# Altium PCB Waveshape_LFO_v1_Main_PCB.PcbDoc
Units mm, origin at the board's own origin, x right, y up, seen from the top; angles counter-clockwise.
Board outline 40 x 105 mm, 2 copper layers (Top Layer, Bottom Layer); 38 components, 28 nets, 124 pads, 29 vias.
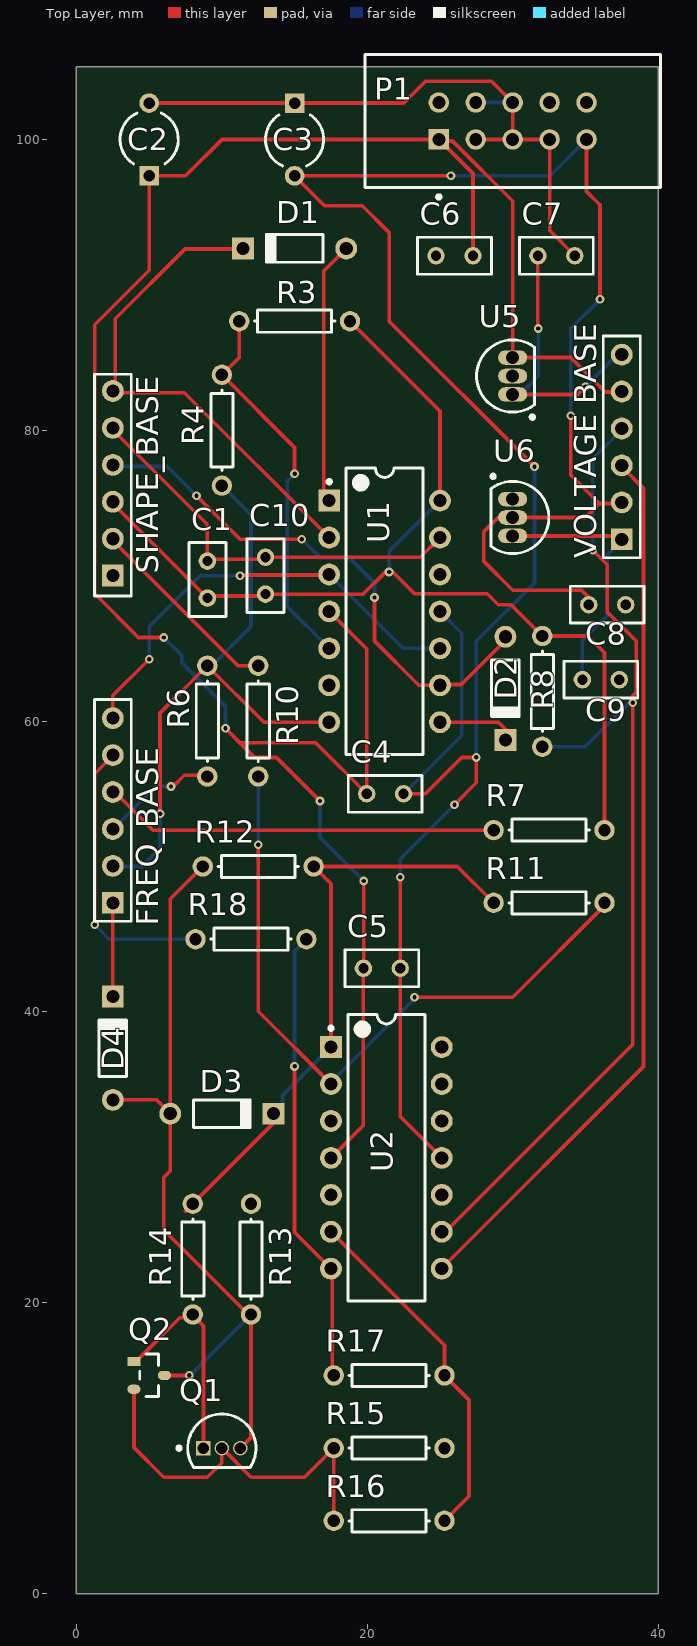
[diagram p0: Top Layer view]
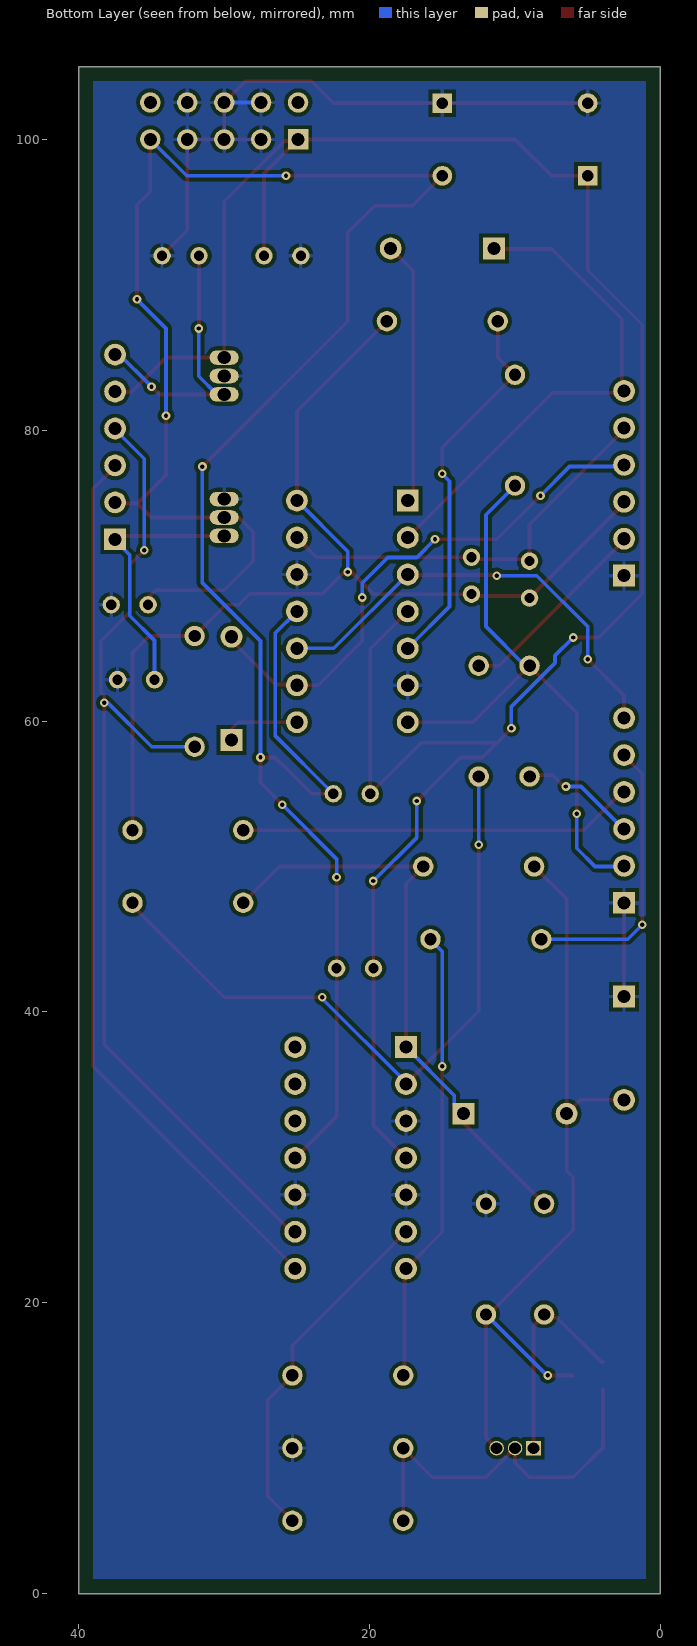
[diagram p1: Bottom Layer view, seen from below]

## Layer stack, top to bottom
Top Solder: solder mask 0.0102, Solder Resist, Dk 3.5
Top Layer: signal copper 0.0356
Dielectric 1: dielectric 0.32, FR-4, Dk 4.8
Bottom Layer: signal copper 0.0356
Bottom Solder: solder mask 0.0102, Solder Resist, Dk 3.5

## Board outline
0,105 40,105 40,0 0,0

## Design rules (kind name [scope] priority, off if disabled: settings)
Clearance [All] p1: gap=0.254 ignorepadtopadclearanceinfootprint=FALSE except(0: Arc-Hole Track-Hole SMDPad-Hole THPad-Hole Via-Hole Fill-Hole Poly-Hole Region-Hole Text-Hole)
PolygonConnect [All] p1: connectstyle=Relief reliefconductorwidth=0.254 reliefentries=4 polygonreliefangle="90 Angle" airgapwidth=0.254
RoutingVias [All] p1: holewidth=0.711 width=1.27 viastyle="Through Hole" minholewidth=0.711 minwidth=1.27 maxholewidth=0.711 maxwidth=1.27
SolderMaskExpansion [All] p1: expansion=0.102 istentingtop=FALSE
Width [All] p1: maxlimit=0.254 minlimit=0.254 preferedwidth=0.254
30 further rules are at their usual default settings.

## Components (designator, comment, footprint, x,y, rotation, side; value= is the part's Value field where it differs from the comment)
C1 "Cap" RAD-0.1 9,69.73 r270 top value=1uF
C2 "Cap Pol1" CAPR5-4X5 5,100 r90 top value=100uF
C3 "Cap Pol1" CAPR5-4X5 15,100 r270 top value=100uF
C4 "Cap" RAD-0.1 21.23,55 r0 top value=1n
C5 "Cap" RAD-0.1 21,43 r0 top value=1n
C6 "Cap" RAD-0.1 26,92 r180 top value=0.33uF
C7 "Cap" RAD-0.1 33,92 r0 top value=0.1uF
C8 "Cap" RAD-0.1 36.5,68 r180 top value=0.33uF
C9 "Cap" RAD-0.1 36.06,62.846 r180 top value=0.1uF
C10 "Cap" RAD-0.1 13,70 r270 top value=1uF
D1 "Diode 1N4148" DO-35 15,92.5 r180 top
D2 "Diode 1N4148" DO-35 29.5,62.25 r270 top
D3 "1N4148" DO-35 10,33 r0 top
D4 "Diode 1N4148" DO-35 2.5,37.5 r90 top
FREQ_BASE "Header 6" HDR1X6#1 2.5,47.5 r90 top
P1 "5103309-1" TECO-5103309-1_V 30,101.27 r180 top
Q1 "J112" ONSC-TO-92-3-29-11 10,10 r0 top
Q2 "MMBFJ201" FP-318BM-IPC_C 5,15 r0 top
R3 "" AXIAL-0.3 15,87.5 r180 top value=100K
R4 "" AXIAL-0.3 10,80 r270 top value=100K
R6 "" AXIAL-0.3 9,60 r270 top value=10K
R7 "" AXIAL-0.3 32.5,52.5 r0 top value=10K
R8 "" AXIAL-0.3 32.036,62.04 r90 top value=4.7K
R10 "" AXIAL-0.3 12.5,60 r90 top value=100K
R11 "" AXIAL-0.3 32.5,47.5 r180 top value=100K
R12 "" AXIAL-0.3 12.5,50 r0 top value=1M
R13 "" AXIAL-0.3 12,23 r270 top value=1M
R14 "" AXIAL-0.3 8,23 r270 top value=1K
R15 "" AXIAL-0.3 21.5,10 r180 top value=1K
R16 "" AXIAL-0.3 21.5,5 r0 top value=10K
R17 "" AXIAL-0.3 21.5,15 r180 top value=10K
R18 "" AXIAL-0.3 12,45 r180 top value=10K
SHAPE_BASE "Header 6" HDR1X6#2 2.5,69.88 r90 top
U1 "TL074" N0014A 21.19,67.54 r0 top
U2 "TL074" N0014A 21.31,29.96 r0 top
U5 "L78L05ACZ" TO-92 30,83.73 r0 top
U6 "L79L05ACZ" TO-92 30,74 r180 top
"VOLTAGE BASE" "Header 6" HDR1X6#1 37.5,72.5 r90 top

## Footprints (in the part's own frame and the unit in brackets; to place one, negate y for a bottom-side part, rotate by r counter-clockwise, add the part's x,y. Pads: shape width x height; smd on the part's side, far side on the other; paste and mask are expansions set on the pad)
AXIAL-0.3 [mm] "Axial Device, Thru-Hole; 2 Leads; 0.3 in Pin Spacing"
  round 1.4 hole 0.85: 1(-3.81,0) 2(3.81,0)
  silkscreen extent -2.77,-0.76 2.77,0.76
CAPR5-4X5 [mm] "Capacitor; 2 Leads"
  rect 1.35x1.35 hole 0.8: 1(-2.5,0)
  round 1.35 hole 0.8: 2(2.5,0)
  silkscreen extent -1.69,-2 1.82,2
DO-35 [mm] "Diode, Axial; Body 3.8 x 1.9 mm (LxDia. max), Lead Dia. 0.53 mm (max)"
  round 1.5 hole 0.9: 1(-3.55,0)
  rect 1.5x1.5 hole 0.9: 2(3.55,0)
  silkscreen extent -1.95,-0.95 2.05,0.95
FP-318BM-IPC_C [mm]
  rect 0.904x0.631 smd paste+0 mask+0: 1(-1.05,0.95)
  rrect100% 0.904x0.631 smd paste+0 mask+0: 2(-1.05,-0.95) 3(1.05,0)
  silkscreen extent -0.65,-1.46 0.65,1.46, body extent -1.6,-1.56 1.6,1.56, height 0.25
HDR1X6#1 [mm] "Connector; Header; 6 Position"
  rect 1.5x1.5 hole 0.9: 1(0,0)
  round 1.5 hole 0.9: 2(2.54,0) 3(5.08,0) 4(7.62,0) 5(10.16,0) 6(12.7,0)
  silkscreen extent -1.27,-1.27 13.97,1.27
HDR1X6#2 [mm] "Connector; Header; 6 Position"
  rect 1.5x1.5 hole 0.9: 1(0.12,0)
  round 1.5 hole 0.9: 2(2.66,0) 3(5.2,0) 4(7.74,0) 5(10.28,0) 6(12.82,0)
  silkscreen extent -1.27,-1.27 13.97,1.27
N0014A [mm] "DIP, 14-Leads, Body 19.7x6.6mm, Pitch 2.54mm"
  rect 1.5x1.5 hole 0.9: 1(-3.81,7.62)
  round 1.5 hole 0.9: 2(-3.81,5.08) 3(-3.81,2.54) 4(-3.81,0) 5(-3.81,-2.54) 6(-3.81,-5.08) 7(-3.81,-7.62) 8(3.81,-7.62) 9(3.81,-5.08) 10(3.81,-2.54) 11(3.81,0) 12(3.81,2.54) 13(3.81,5.08) 14(3.81,7.62)
  silkscreen extent -3.93,-9.85 2.65,9.85, body extent -3.95,-9.85 3.95,9.85, height 5.08
ONSC-TO-92-3-29-11 [mm] "TO, 3-Leads, Body Dia 4.7mm, Pitch 1.27mm"
  rect 1x1 hole 0.8: 1(-1.27,0)
  round 1 hole 0.8: 2(0,0) 3(1.27,0)
  silkscreen extent -3.07,-1.34 2.35,2.35, body extent -2.35,-1.33 2.36,2.36, height 7.87
RAD-0.1 [mm] "Radial Cap, Thru-Hole; 2 Leads; 0.1 in Pin Spacing"
  round 1.2 hole 0.7: 1(-1.27,0) 2(1.27,0)
  silkscreen extent -2.54,-1.27 2.54,1.27
TECO-5103309-1_V [mm] "Male Header, 10-Leads, Body 20.32x9.144mm, Pitch 2.54mm"
  rect 1.4x1.4 hole 0.889: 1(5.08,1.27)
  round 1.4 hole 0.889: 2(5.08,-1.27) 3(2.54,1.27) 4(2.54,-1.27) 5(0,1.27) 6(0,-1.27) 7(-2.54,1.27) 8(-2.54,-1.27) 9(-5.08,1.27) 10(-5.08,-1.27)
  silkscreen extent -10.16,-4.57 10.16,5.35, body extent -10.16,-4.57 10.16,4.57, height 9.85
TO-92 [mm] "TO, Flat Index; 3 In-Line, Axial Leads; Body Dia. 4.7mm; Lead Dia. 0.56 mm (max)"
  oval 2x1 hole 0.9: 1(0,-1.27) 2(0,0) 3(0,1.27)
  silkscreen extent -2.48,-2.95 1.5,2.48, body extent -2.48,-2.5 1.5,2.5, height 4.95

## Part data
C1 C4 C5 C6 C7 C8 C9 C10: "Capacitor", LatestRevisionDate=17-Jul-2002, LatestRevisionNote="Re-released for DXP Platform.", PackageDescription="Radial Cap, Thru-Hole; 2 Leads; 0.3 in Pin Spacing", PackageReference=RAD-0.3, Published=8-Jun-2000, Publisher="Altium Limited"
C2 C3: "Polarized Capacitor (Radial)", LatestRevisionDate=17-Jul-2002, LatestRevisionNote="Re-released for DXP Platform.", PackageDescription="Polarized Capacitor (Radial); 2 Leads", PackageReference=RB7.6-15, Published=8-Jun-2000, Publisher="Altium Limited"
D1 D2 D4: "High Conductance Fast Diode", Code_JEDEC=DO-204-AH, ComponentLink1Description="Manufacturer Link", ComponentLink1URL=http://www.fairchildsemi.com/, ComponentLink2Description=Datasheet, ComponentLink2URL=http://www.fairchildsemi.com/ds/1N%2F1N4148.pdf, DatasheetVersion=1997, LatestRevisionDate=17-Jul-2002, LatestRevisionNote="Re-released for DXP Platform.", PackageDescription="Diode, Axial; Body 3.8 x 1.9 mm (LxDia. max), Lead Dia. 0.53 mm (max)", PackageReference=DO-35, Published=8-Jun-2000, Publisher="Altium Limited"
D3: library part "Diode 1N4148", "High Conductance Fast Diode", Code_JEDEC=DO-204-AH, ComponentLink1Description="Manufacturer Link", ComponentLink1URL=http://www.fairchildsemi.com/, ComponentLink2Description=Datasheet, ComponentLink2URL=http://www.fairchildsemi.com/ds/1N%2F1N4148.pdf, DatasheetVersion=1997, LatestRevisionDate=17-Jul-2002, LatestRevisionNote="Re-released for DXP Platform.", PackageDescription="Diode, Axial; Body 3.8 x 1.9 mm (LxDia. max), Lead Dia. 0.53 mm (max)", PackageReference=DO-35, Published=8-Jun-2000, Publisher="Altium Limited"
FREQ_BASE SHAPE_BASE "VOLTAGE BASE": "Header, 6-Pin", LatestRevisionDate=17-Jul-2002, LatestRevisionNote="Re-released for DXP Platform.", Publisher="Altium Limited", System=Connector
P1: library part CMP-2000-07502-1, "Male Header, Pitch 2.54 mm, 2 x 5 Position, Height 9.855 mm, Tail Length 3.048 mm, -65 to 105 degC, RoHS, Tube", Colour=Black, Current Rating=1A, Flammability Rating=UL94V-0, Insulation Resistance=5GR, Manufacturer="TE Connectivity", Max Operating Temperature=105degC, Min Operating Temperature=-65degC, Package Description="Male Header, Pitch 2.54 mm, 2 x 5 Position, Height 9.855 mm, Tail Length 3.048 mm", Package Quantity=35, Board Standoff=Yes(With), Body Material=Thermoplastic, Connector System=Wire-to-Board, Connector Type=Header, Contact Gender=Male, Contact Material=CopperAlloy, Contact Mating Length=0.24inch, Contact Plating=Gold, Contact Shape=Square, Datasheet URL=http://www.te.com/commerce/DocumentDelivery/DDEController?Action=showdoc&DocId=Customer+Drawing%7F5103309%7FE1%7Fpdf%7FEnglish%7FENG_CD_5103309_E1.pdf%7F5103309-1, Datasheet Version="Rev. E1, 03/2011", Depth=9.14mm, ELV=Compliant, Gender=Male, Height=8.813mm, Housing Colour=Black, Housing Material=PBT, Lead Free=LeadFree, Length=0.8inch, Manufacturer URL=http://www.te.com/, Mating Alignment=Yes(With), Mating Connector Lock=No(Without), Mating Retention=No(Without), Max Current Rating=1A, Mount=ThroughHole, Mounting Technology=ThroughHole, Number of Contacts=10, Number of Positions=10, Number of Rows=2, Orientation=Straight, Package Reference=5103309-1, Packaging=Rail/Tube, Panel Mount Retention=No(Without), PCB Mount Alignment=No(Without), PCB Mount Retention=Without, PCB Mounting Orientation=Vertical, Pitch=2.54mm, REACH SVHC=NoSVHC, RoHSCompliant=True, Row Spacing=2.54mm, Shrouded=Yes(With), Shrouded End Dimension=3.81mm, Termination=ThroughHole, Termination Post Length=0.12inch
Q1: library part CMP-1062-00071-1, "JFET Chopper Transistor, N-Channel - Depletion, 3-Pin TO-92, Bulk Box", Manufacturer="On Semiconductor", Channel Polarity="N Channel", ComponentLink1Description="Manufacturer URL", ComponentLink1URL=http://www.onsemi.com/, ComponentLink2Description=Datasheet, ComponentLink2URL=http://www.onsemi.com/pub_link/Collateral/J111-D.PDF, ComponentLink3Description="Package Specification", ComponentLink3URL=http://www.onsemi.cn/pub_link/Collateral/2N6426-D.PDF, DatasheetVersion="Rev. 2", Mounting Technology="Through Hole", PackageDescription="3-Pin Transistor Outline, Body 4.825 x 3.685 mm, Pitch 1.27 mm", PackageReference=TO-92-3-29-11_AM_SL, PackageVersion="Rev. AM", Packing="Bulk Box", PartNumber=J112, V(BR)GSS Min (V)=35
Q2: library part CMP-07172-000003-1, "JFET N-CH 40V 350MW SOT23", Breakdown Voltage=-40V, Continuous Drain Current=1mA, Manufacturer="ON Semiconductor", Max Junction Temp=+150°C, Package=318BM, Power Dissipation=350mW, Temperature="-55°C to +150°C", Temperature Range Low=-55°C, Automotive=No, Category=Trans, ComponentLink2Description=Datasheet, ComponentLink2URL=https://www.onsemi.com/pub/Collateral/MMBFJ202-D.pdf, Device Class L1="Discrete Semiconductors", Device Class L2=Transistors, Device Class L3=JFETs, Digikey Description="JFET N-CH 40V 350MW SOT23", Footprint Url=https://www.onsemi.com/pub/Collateral/318BM.PDF, Gate To Source Voltage=-40V, Height=1.2mm, Ipc Land Pattern Name=SOT95P240X120-3, Lead Free=Yes, Manufacturer Part Number=MMBFJ201, Mouser Description="JFET N-Channel Transistor General Purpose", Number of Channels=1, Number Of N Channels=1, Octopart=https://octopart.com/mmbfj201-on+semiconductor-84330255, RoHS=TRUE, Rthja Max=357°C/W, Standoff Height=0mm, Temperature Range High=+150°C
R3 R4 R6 R7 R8 R10 R11 R12 R13 R14 R15 R16 R17 R18: library part Res1, "Resistor", LatestRevisionDate=17-Jul-2002, LatestRevisionNote="Re-released for DXP Platform.", PackageDescription="Axial Device, Thru-Hole; 2 Leads; 0.3 in Pin Spacing", PackageReference=AXIAL-0.3, Published=8-Jun-2000, Publisher="Altium Limited"
U1 U2: library part CMP-0015-00129-2, "Quad Low-Noise JFET-Input General-Purpose Operational Amplifier, 7 to 36 V, 0 to 70 degC, 14-pin DIP (N14), Pb-Free (RoHS)", Manufacturer="Texas Instruments", PartNumber=TL074CN, Rating=Military, Total Supply Voltage(Max)(+5V is 5, +/-5V is 10)=36, Total Supply Voltage(Min)(+5V is 5, +/-5V is 10)=7, CMRR(Min)(dB)=70, Code_JEDEC=MS-001, ComponentLink1Description="Manufacturer URL", ComponentLink1URL=http://www.ti.com/, ComponentLink2Description=Datasheet, ComponentLink2URL=http://www.ti.com/lit/ds/symlink/tl074.pdf, ComponentLink3Description="Package Specification", ComponentLink3URL=http://www.ti.com/lit/ml/mpdi002c/mpdi002c.pdf, DatasheetVersion=SLOS080J, Eco-Plan="Pb-Free (RoHS)", GBW(Typ)(MHz)=3, IIB(Max)(pA)=200, Iq per channel(Max)(mA)=2.5, Mounting Technology="Through Hole", Number of Channels=4, Offset Drift(Typ)(uV/C)=18, PackageDescription="14-Pin Plastic In-Line, Body 19.305 x 6.35 mm, Pitch 2.54 mm", PackageReference=N0014A, PackageVersion="4040049/E, 12/2002", Slew Rate(Typ)(V/us)=13, Sub Family="General Purpose Amplifier, High Supply Voltage Amplifier (>=30V)", Vio (25C)(Max)(mV)=10, Vn at 1kHz(Typ)(nV/rtHz)=18
U5: library part CMP-0244-00012-1, "Positive Voltage Regulator, 5V, 3-Pin TO-92", ComponentLink1Description="Manufacturer URL", ComponentLink1URL=http://www.st.com, ComponentLink2Description=Datasheet, ComponentLink2URL=http://www.st.com/internet/com/TECHNICAL_RESOURCES/TECHNICAL_LITERATURE/DATASHEET/CD00000446.pdf, DatasheetVersion=1/02/2011, PackageDescription="TO, Flat Index; 3 In-Line, Axial Leads; Body Dia. 4.7mm; Lead Dia. 0.56 mm (max)", PackageReference=TO-92, PackageVersion=2011
U6: library part CMP-0244-00030-1, "Negative Voltage Regulator, -5V, 3-Pin TO-92", ComponentLink1Description="Manufacturer URL", ComponentLink1URL=http://www.st.com, ComponentLink2Description=Datasheet, ComponentLink2URL=http://www.st.com/internet/com/TECHNICAL_RESOURCES/TECHNICAL_LITERATURE/DATASHEET/CD00000539.pdf, DatasheetVersion=1/07/2009, PackageDescription="TO, Flat Index; 3 In-Line, Axial Leads; Body Dia. 4.7mm; Lead Dia. 0.56 mm (max)", PackageReference=TO-92, PackageVersion=2011

## Via types
v1: diameter 0.6, hole 0.3, Top Layer to Bottom Layer, 29 vias

## Nets (pads, with @x,y where several pads share a name; then routed paths per layer and width w, separated by ;. In a path a pad name is that pad's centre, name@x,y a point inside that pad or via, vN(x,y) a via of type N, cw(c..) or ccw(c..) an arc to the next point about the centre after c; other vN are vias at no path point)
+12: "VOLTAGE BASE.5" C2.1 C4.1 C5.1 C6.1 P1.1 U1.4 U2.4 U5.3 | length 159.3
  Top Layer w0.254: v1(6,65.75) 4.25,65.75 1.25,68.75 1.25,87.25 5,91 C2.1 7.5,97.5 10,100 P1.1 ; v1(10.25,59.5) 11.25,58.5 ; v1(16.75,54.5) 13.75,57.5 12.25,57.5 11.25,58.5 ; U1.4 19.96,64.96 C4.1 16.46,58.5 11.25,58.5 ; U2.4 19.73,32.19 C5.1 19.75,43.02 v1(19.75,49) ; C6.1 27.27,97.65 25.272,99.648 P1.1 ; 37.449,82.631 36.369,82.631 34,85 U5.3 30,95.75 25.852,99.898 25.022,99.898 P1.1
  Bottom Layer w0.254: v1(6,65.75) 7.25,64.5 7.25,64 10.25,61 v1(10.25,59.5) ; v1(16.75,54.5) 16.75,52 v1(19.75,49)
-12: "VOLTAGE BASE.2" C3.2 C4.2 C5.2 C8.2 P1.9 U1.11 U2.11 U6.2 | length 171.2
  Top Layer w0.254: v1(22.27,49.25) C5.2 22.27,32.81 U2.11 ; C4.2 24,55 25.375,56.375 26.5,57.5 v1(27.5,57.5) 27.5,55.75 v1(26,54.25) ; v1(25.75,97.5) C3.2 17.054,95.446 19.655,95.446 21.5,93.601 21.5,87.5 v1(31.5,77.5) ; v1(34,81) 34,76.92 35.96,74.96 ; P1.9 35.08,96.412 35.851,95.641 36,95.492 v1(36,89) ; C8.2@35.73,68 35.48,68.25 34.73,69 30,69 28,71 28,73 29,74 U6.2 35,74 35.96,74.96 ; 37.5,74.96 35.96,74.96
  Bottom Layer w0.254: v1(22.27,49.25) 22.27,50.52 v1(26,54.25) ; C4.2 26.5,59 26.5,66.04 U1.11 ; v1(25.75,97.5) 32.58,97.5 P1.9 ; v1(27.5,57.5) 27.5,65.5 31.5,69.5 v1(31.5,77.5) ; v1(34,81) 34,87 v1(36,89)
GND: C2.2 C3.1 C6.2 C7.2 C8.1 C9.1 D4.2 FREQ_BASE.1 P1.3 P1.4 P1.5 P1.6 P1.7 P1.8 R13.1 R15.1 SHAPE_BASE.1 U1.6 U1.12 U2.3 U2.5 U2.10 U5.2 U6.1 | length 53.3
  Top Layer w0.254: FREQ_BASE.1@2.5,47.46 D4.2 D4.2@3.113,40.437 ; FREQ_BASE.1 2.5,47.54 FREQ_BASE.1@2.75,47.79 ; C2.2 C3.1 22.5,102.5 24,104 28.54,104 P1.6 P1.5 ; P1.4@27.055,102.945 P1.4 ; P1.3 P1.5 ; C7.2 32.54,93.73 P1.7 P1.5
  Bottom Layer w0.254: P1.4 P1.6
LED1: "VOLTAGE BASE.4" R8.1 U2.9 | length 70.4
  Top Layer w0.254: U2.9 25.38,24.88 38.25,37.75 v1(38.25,61.25) 38.25,61.75 38.492,61.992 38.492,65.508 36.5,67.5 36.5,70.75 v1(35.5,71.75) ; R8.1 R8.1@32.056,58.25
  Bottom Layer w0.254: R8.1 34.98,58.23 38,61.25 v1(38.25,61.25) ; v1(35.5,71.75) 35.5,78.04 37.5,80.04
LED2: "VOLTAGE BASE.3" U2.8 | length 61.5
  Top Layer w0.254: U2.8 25.12,22.37 39,36.25 39,76 37.5,77.5
NetC1_1: C1.1 C10.1 SHAPE_BASE.5 U1.13 | length 28.4
  Top Layer w0.254: SHAPE_BASE.5@2.5,80.04 9,73.54 C1.1 9.135,71.135 12.865,71.135 C10.1 23.65,71.27 U1.13
NetC1_2: C1.2 C10.2 R3.1 R7.2 R8.2 SHAPE_BASE.3 U1.14 | length 73
  Top Layer w0.254: SHAPE_BASE.3@2.5,74.96 C1.2 9.135,68.595 12.865,68.595 C10.2 19.73,68.73 21.25,70.25 v1(21.5,70.25) 21.75,70.25 23.247,68.753 28.247,68.753 29,68 29.886,68 R8.2 35.15,65.85 36.31,64.69 R7.2 ; R3.1 25,81.31 U1.14
  Bottom Layer w0.254: v1(21.5,70.25) 21.5,71.66 U1.14
NetC2_2: 
NetC7_1: "VOLTAGE BASE.6" C7.1 U5.1 | length 19.4
  Top Layer w0.254: U5.1 34.46,82.46 v1(35,83) ; C7.1 31.73,87.02 v1(31.75,87) ; 37.214,85.12 37.5,85.12
  Bottom Layer w0.254: U5.1 30.5,82.46 31.75,83.71 v1(31.75,87) ; v1(35,83) 37.35,85.35
NetC9_2: "VOLTAGE BASE.1" C9.2 U6.3 | length 18.3
  Top Layer w0.254: U6.3 37.19,72.73 37.5,72.42
  Bottom Layer w0.254: C9.2 34.79,65.54 36.5,67.25 36.5,71.42 37.5,72.42
NetD1_1: D1.1 U1.1 | length 18.1
  Top Layer w0.254: U1.1 17,75.54 17,90.95 D1.1
NetD1_2: D1.2 SHAPE_BASE.6 U1.2 | length 34.9
  Top Layer w0.254: D1.2 11.418,92.468 7.468,92.468 2.661,87.661 2.661,82.741 2.5,82.58 7.42,82.58 U1.2
NetD2_1: D2.1 SHAPE_BASE.4 U1.9 | length 37.6
  Top Layer w0.254: v1(8.25,75.5) 11.25,72.5 v1(15.5,72.5) ; v1(20.5,68.5) 20.5,65.5 23.54,62.46 U1.9 25.058,62.518 26.468,62.518 D2.1@30,66.05
  Bottom Layer w0.254: SHAPE_BASE.4@2.5,77.5 6.25,77.5 v1(8.25,75.5) ; v1(15.5,72.5) 16.75,71.25 18.75,71.25 20.5,69.5 v1(20.5,68.5)
NetD2_2: D2.2 U1.8 | length 5.4
  Top Layer w0.254: U1.8 29.03,59.92 D2.2@30,58.95
NetD3_1: D3.1 D4.1 Q1.3 Q2.3 R12.1 R13.2 | length 56.1
  Top Layer w0.254: D4.1 5.5,33.95 D3.1 ; Q2.3 v1(7.75,15) ; R12.1 6.45,47.76 D3.1 ; Q1.3 12,10.73 R13.2@12,19 ; R13.2 R13.2@12,19 ; D3.1 6.45,29.056 6,28.606 6,25 R13.2@12,19
  Bottom Layer w0.254: v1(7.75,15) 7.81,15 R13.2
NetD3_2: D3.2 R11.2 R12.2 R14.1 U2.1 | length 41.7
  Top Layer w0.254: 7.5,26.31 13.55,32.36 D3.2 ; U2.1 17.5,48.81 R12.2 26.19,50 R11.2
  Bottom Layer w0.254: D3.2 14.173,33.623 14.173,34.253 U2.1
NetFREQ_BASE_2: FREQ_BASE.2 R4.2 R6.1 U1.7 | length 42.3
  Top Layer w0.254: v1(5.75,53.625) 5.75,60.56 R6.1 12.89,59.92 U1.7
  Bottom Layer w0.254: FREQ_BASE.2@2.5,50 4.5,50 5.75,51.25 v1(5.75,53.625) ; R6.1 9.31,63.81 12,66.5 12,74.19 R4.2
NetFREQ_BASE_3: FREQ_BASE.3 R6.2 | length 8.1
  Top Layer w0.254: v1(6.5,55.5) 6.643,55.5 7.412,56.269 8.921,56.269 R6.2
  Bottom Layer w0.254: FREQ_BASE.3@2.5,52.54 5.46,55.5 v1(6.5,55.5)
NetFREQ_BASE_4: FREQ_BASE.4 R7.1 | length 27.3
  Top Layer w0.254: FREQ_BASE.4@2.5,55.08 2.67,55.08 5.25,52.5 R7.1
NetFREQ_BASE_5: FREQ_BASE.5 R18.2 | length 19.5
  Top Layer w0.254: v1(1.25,46) 1.25,56.37 FREQ_BASE.5@2.5,57.62
  Bottom Layer w0.254: v1(1.25,46) 2.25,45 R18.2
NetFREQ_BASE_6: FREQ_BASE.6 U1.3 U1.10 | length 31
  Top Layer w0.254: FREQ_BASE.6@2.5,60.16 2.5,61.75 v1(5,64.25) ; v1(11.25,70) 11.29,70.04 17.34,70.04 U1.3
  Bottom Layer w0.254: v1(5,64.25) 5,66.5 8.5,70 v1(11.25,70) ; U1.3 22.46,65 U1.10
NetQ1_1: Q1.1 Q2.1 R14.2 | length 14.9
  Top Layer w0.254: Q2.1 4.087,15.95 7.107,18.971 7.781,18.971 R14.2 8,19.121 8.73,18.391 Q1.1
NetQ1_2: Q1.2 Q2.2 R15.2 R16.1 | length 26.7
  Top Layer w0.254: Q2.2 3.95,10.05 6,8 9,8 10,9 Q1.2 12,8 15.69,8 R15.2 R16.1
NetR3_2: R3.2 R4.1 U1.5 | length 26.5
  Top Layer w0.254: R3.2 11.19,85 R4.1 15,78.81 v1(15,77)
  Bottom Layer w0.254: v1(15,77) 14.5,76.5 14.5,67.88 U1.5
NetR10_1: R10.1 R11.1 U2.2 | length 47.2
  Top Layer w0.254: v1(12.5,51.5) 12.5,40.04 U2.2 ; v1@23.46,41 30,41 36.31,47.31 R11.1
  Bottom Layer w0.254: v1(12.5,51.5) R10.1 ; U2.2 17.5,35.156 23.25,40.906 v1(23.25,41)
NetR10_2: R10.2 SHAPE_BASE.2 | length 13.6
  Top Layer w0.254: SHAPE_BASE.2@2.5,72.42 11.11,63.81 R10.2
NetR16_2: R16.2 R17.1 U2.6 | length 24.5
  Top Layer w0.254: U2.6 25.31,17.07 R17.1 27,13.31 27,6.69 R16.2
NetR17_2: R17.2 R18.1 U2.7 | length 31.4
  Top Layer w0.254: v1(15,36.25) 15,24.84 U2.7 17.595,22.245 17.595,15.095 R17.2
  Bottom Layer w0.254: v1(15,36.25) 15,44.149 15.81,44.959 R18.1
pads on no net: P1.2 P1.10 U2.12 U2.13 U2.14

## Polygon pours and split planes (outlines as drawn)
no net on Bottom Layer "NONET_L02_P001" (solid, remove dead copper, pour order 1): 59,12
GND on Bottom Layer "GND_L02_P000" (solid, remove dead copper, pour order 0): 1,1 1,104 39,104 39,1

## Silkscreen, mask and mechanical layers (free items; w line width, h text height)
Mechanical 1:
  the board outline again, w0.254